# EAGLE board CT_schematic (EAGLE 7.6.0)

Size 100 x 80 mm. Coordinates in mm from the lower left corner, seen from the top.
Outline: 0,0 100,0 100,80 0,80 0,0
Copper layers (1*16): Top 0.035mm / dielectric 1.5mm / Bottom 0.035mm
Design rules "default": minimum track width 10mil, minimum drill 24mil, track to track 8mil, track to pad 8mil, pad to pad 8mil, via to via 8mil, smd to smd 8mil, copper to edge 40mil, drill to drill 8mil, minimum pad ring 10mil, minimum via ring 8mil, stop-mask expansion 4mil, vias tented up to drill 0mil, thermal gap 10mil

## Footprints (pad centres in the part's own frame; a part is rotated, then mirrored left to right if it is on the bottom)
C0603 = smd 0.8 x 0.8: 1 -0.762,0; 2 0.762,0
C0402 = smd 0.5 x 0.5: 1 -0.508,0; 2 0.508,0
C0805 = smd 1.2 x 1.3: 1 -1.016,0; 2 1.016,0
C1206 = smd 1.3 x 1.6: 1 -1.524,0; 2 1.524,0
C1210 = smd 1.2 x 2.5: 1 -1.524,0; 2 1.524,0
EXV-9H = smd 3.505 x 1.676: 1 -2.857,0; 2 2.857,0
L0603 = smd 0.8 x 0.8: 1 -0.762,0; 2 0.762,0
PJ-037B_PACKAGE = drill 3.7 square: 1 12,0 | drill 3.2 square: 2 6,0
R0603 = smd 0.8 x 0.8: 1 -0.762,0; 2 0.762,0
LQFP48 = smd 0.3 x 1.2: 1 -2.75,-4.25; 2 -2.25,-4.25; 3 -1.75,-4.25; 4 -1.25,-4.25; 5 -0.75,-4.25; 6 -0.25,-4.25; 7 0.25,-4.25; 8 0.75,-4.25; 9 1.25,-4.25; 10 1.75,-4.25; 11 2.25,-4.25; 12 2.75,-4.25; 25 2.75,4.25; 26 2.25,4.25; 27 1.75,4.25; 28 1.25,4.25; 29 0.75,4.25; 30 0.25,4.25; 31 -0.25,4.25; 32 -0.75,4.25; 33 -1.25,4.25; 34 -1.75,4.25; 35 -2.25,4.25; 36 -2.75,4.25 | smd 1.2 x 0.3: 13 4.25,-2.75; 14 4.25,-2.25; 15 4.25,-1.75; 16 4.25,-1.25; 17 4.25,-0.75; 18 4.25,-0.25; 19 4.25,0.25; 20 4.25,0.75; 21 4.25,1.25; 22 4.25,1.75; 23 4.25,2.25; 24 4.25,2.75; 37 -4.25,2.75; 38 -4.25,2.25; 39 -4.25,1.75; 40 -4.25,1.25; 41 -4.25,0.75; 42 -4.25,0.25; 43 -4.25,-0.25; 44 -4.25,-0.75; 45 -4.25,-1.25; 46 -4.25,-1.75; 47 -4.25,-2.25; 48 -4.25,-2.75
SSOP-28 = smd 1.5 x 0.4: 1 -3.625,4.225; 2 -3.625,3.575; 3 -3.625,2.925; 4 -3.625,2.275; 5 -3.625,1.625; 6 -3.625,0.975; 7 -3.625,0.325; 8 -3.625,-0.325; 9 -3.625,-0.975; 10 -3.625,-1.625; 11 -3.625,-2.275; 12 -3.625,-2.925; 13 -3.625,-3.575; 14 -3.625,-4.225; 15 3.625,-4.225; 16 3.625,-3.575; 17 3.625,-2.925; 18 3.625,-2.275; 19 3.625,-1.625; 20 3.625,-0.975; 21 3.625,-0.325; 22 3.625,0.325; 23 3.625,0.975; 24 3.625,1.625; 25 3.625,2.275; 26 3.625,2.925; 27 3.625,3.575; 28 3.625,4.225
FCI_10118193-0001LF = smd 0.4 x 1.35: 1 -1.3,2.675; 2 -0.65,2.675; 3 0,2.675; 4 0.65,2.675; 5 1.3,2.675 | smd 1.6 x 1.4: 6 -3.2,2.45; 7 3.2,2.45 | smd 1.9 x 1.9: 8 -1.2,0; 9 1.2,0 | hole 0.5: -3.3,0; 3.3,0
HTSS-105-01-G-D = drill 1 pad 1.8 square: 1 0,0 | drill 1 pad 1.8: 2 0,2.54; 3 2.54,0; 4 2.54,2.54; 5 5.08,0; 6 5.08,2.54; 7 7.62,0; 8 7.62,2.54; 9 10.16,0; 10 10.16,2.54
ABS07-32.768KHZ-7-T = smd 1.1 x 2.4: 1 -2.5,0; 2 0,0
ABLS-25.000MHZ-B2F-T = smd 5.6 x 2.8: 1 -3.81,0; 2 5.69,0
ABLS-12.000MHZ-B4-T = smd 5.6 x 2.8: 1 0,0; 2 9.5,0
WSON-8 = smd 0.3 x 0.6: 1 -0.75,0; 2 0.05,0; 3 0.85,0; 4 1.65,0; 5 1.65,3.8; 6 0.85,3.8; 7 0.05,3.8; 8 -0.75,3.8 | smd 3 x 2.6: PAD 0.45,1.9
SON-6 = smd 0.55 x 0.3: 1 -0.355,0.5 | smd 0.52 x 0.3: 2 -0.37,0; 3 -0.37,-0.5; 4 0.37,-0.5; 5 0.37,0; 6 0.37,0.5
SW_4-1437565-2 = smd 1.4 x 2.1: 1 -2.23,4.55; 2 -2.23,-4.55; 3 2.23,4.55; 4 2.23,-4.55
LGM67K-G1J2-24-Z = smd 0.8 x 1.4: A -2,0; C 0,0
NC7SZ125M5X = smd 1.3 x 0.7: 1 -1.3,0.95; 2 -1.3,0; 3 -1.3,-0.95; 4 1.3,-0.95; 5 1.3,0.95

## Placement (x,y rotation side)
C1  1e-07  [C0603]  -15.24,59.69 0 top  (outside the outline)
C2  1e-07  [C0603]  -19.05,59.69 0 top  (outside the outline)
C3  4.7e-06  [C0603]  -64.77,54.61 0 top  (outside the outline)
C4  1e-07  [C0603]  -22.86,59.69 0 top  (outside the outline)
C5  1e-08  [C0603]  -26.67,59.69 0 top  (outside the outline)
C6  1e-06  [C0603]  -30.48,59.69 0 top  (outside the outline)
C7  1e-11  [C0402]  -64.77,59.69 0 top  (outside the outline)
C8  1e-11  [C0402]  -15.24,64.77 0 top  (outside the outline)
C9  1e-11  [C0402]  -19.05,64.77 0 top  (outside the outline)
C10  1e-11  [C0402]  -22.86,64.77 0 top  (outside the outline)
C11  1e-07  [C0402]  -26.67,64.77 0 top  (outside the outline)
C12  4.7e-06  [C0805]  -66.04,46.99 0 top  (outside the outline)
C13  1e-07  [C0402]  -30.48,64.77 0 top  (outside the outline)
C14  1e-07  [C0402]  -34.29,64.77 0 top  (outside the outline)
C15  1e-07  [C0402]  -38.1,64.77 0 top  (outside the outline)
C16  1e-07  [C0402]  -41.91,64.77 0 top  (outside the outline)
C17  1e-07  [C0402]  -45.72,64.77 0 top  (outside the outline)
C18  1e-07  [C0402]  -49.53,64.77 0 top  (outside the outline)
C19  1e-07  [C0402]  -53.34,64.77 0 top  (outside the outline)
C20  1e-08  [C0402]  -57.15,64.77 0 top  (outside the outline)
C21  1e-05  [C1206]  -54.61,46.99 0 top  (outside the outline)
C22  1e-05  [C1210]  -48.26,46.99 0 top  (outside the outline)
C23  1e-07  [C0402]  -60.96,64.77 0 top  (outside the outline)
C24  0.0001  [EXV-9H]  -48.26,31.75 0 top  (outside the outline)
C25  0.0001  [EXV-9H]  -59.69,31.75 0 top  (outside the outline)
C26  1e-08  [C0402]  -64.77,64.77 0 top  (outside the outline)
F1  240.0  [L0603]  -34.29,59.69 0 top  (outside the outline)
J1  PJ-037B  [PJ-037B_PACKAGE]  -52.07,7.62 0 top  (outside the outline)
R1  10000.0  [R0603]  -35.56,54.61 0 top  (outside the outline)
R2  1000.0  [R0603]  -38.1,59.69 0 top  (outside the outline)
R3  1600.5  [R0603]  -41.91,59.69 0 top  (outside the outline)
R4  4700.0  [R0603]  -45.72,59.69 0 top  (outside the outline)
R5  10000.0  [R0603]  -40.64,54.61 0 top  (outside the outline)
R6  4700.0  [R0603]  -49.53,59.69 0 top  (outside the outline)
R7  10000.0  [R0603]  -45.72,54.61 0 top  (outside the outline)
R8  10000.0  [R0603]  -50.8,54.61 0 top  (outside the outline)
R9  100000.0  [R0603]  -15.24,54.61 0 top  (outside the outline)
R10  100000.0  [R0603]  -20.32,54.61 0 top  (outside the outline)
R11  2231.0  [R0603]  -53.34,59.69 0 top  (outside the outline)
R12  1000.0  [R0603]  -57.15,59.69 0 top  (outside the outline)
R13  10000.0  [R0603]  -55.88,54.61 0 top  (outside the outline)
R14  10000.0  [R0603]  -60.96,54.61 0 top  (outside the outline)
R15  9100.0  [R0603]  -60.96,59.69 0 top  (outside the outline)
R16  680000.0  [R0603]  -25.4,54.61 0 top  (outside the outline)
R17  120000.0  [R0603]  -30.48,54.61 0 top  (outside the outline)
U1  STM32F030CCT6  [LQFP48]  -44.45,20.32 0 top  (outside the outline)
U2  FT232RL-REEL  [SSOP-28]  -20.32,7.62 0 top  (outside the outline)
U3  10118193-0001LF  [FCI_10118193-0001LF]  -38.1,31.75 0 top  (outside the outline)
U4  ST3241EBPR  [SSOP-28]  -31.75,7.62 0 top  (outside the outline)
U5  HTSS-105-01-G-D  [HTSS-105-01-G-D]  -64.77,19.05 0 top  (outside the outline)
U6  ABS07-32.768KHZ-7-T  [ABS07-32.768KHZ-7-T]  -27.94,48.26 0 top  (outside the outline)
U7  ABLS-25.000MHZ-B2F-T  [ABLS-25.000MHZ-B2F-T]  -26.67,40.64 0 top  (outside the outline)
U8  ABLS-12.000MHZ-B4-T  [ABLS-12.000MHZ-B4-T]  -50.8,40.64 0 top  (outside the outline)
U9  LP3878SDX-ADJ/NOPB  [WSON-8]  -30.48,30.48 0 top  (outside the outline)
U10  TPS3895ADRYR  [SON-6]  -13.97,68.58 0 top  (outside the outline)
U11  4-1437565-2  [SW_4-1437565-2]  -27.94,21.59 0 top  (outside the outline)
U12  Q65110A2395  [LGM67K-G1J2-24-Z]  -36.83,48.26 0 top  (outside the outline)
U13  nc7sz125m5x  [NC7SZ125M5X]  -59.69,46.99 0 top  (outside the outline)

## Library data of the parts
C1-C26 F1 J1 R1-R17 U1-U13 = circuit_tree

## Nets
CLK_CRYSTAL_U1_3: C7.1 U1.3 U6.1
CLK_CRYSTAL_U1_4: C8.1 U1.4 U6.2
CLK_CRYSTAL_U1_5: C9.1 U1.5 U7.1
CLK_CRYSTAL_U1_6: C10.1 U1.6 U7.2
CLK_CRYSTAL_U2_27: U2.27 U8.1
CLK_CRYSTAL_U2_28: U2.28 U8.2
GND: C1.2 C2.2 C3.2 C4.2 C5.2 C6.2 C7.2 C8.2 C9.2 C10.2 C11.2 C12.2 C13.2 C14.2 C15.2 C18.2 C19.2 C20.2 C21.2 C22.2 C23.2 C24.2 C25.2 C26.2 J1.2 R2.2 R5.2 R8.2 R12.2 R15.2 R17.2 U1.8 U1.23 U1.35 U1.47 U2.7 U2.18 U2.21 U2.25 U2.26 U3.5 U3.6 U3.7 U3.8 U3.9 U4.23 U4.25 U5.9 U9.3 U9.PAD U10.2 U12.C U13.1 U13.3
NET_U1_7: R4.1 U1.7 U13.4
NET_U1_9: C5.1 C6.1 F1.1 U1.9
NET_U1_44: R5.1 U1.44
NET_U1_45: R3.1 U1.45 U12.A
NET_U1_46: R1.1 U1.46 U11.3 U11.4
NET_U2_14: R7.1 U2.14
NET_U2_17: C13.1 U2.17
NET_U2_19: R8.1 U2.19
NET_U3_1: R6.1 U3.1
NET_U3_2: U2.16 U3.2
NET_U3_3: U2.15 U3.3
NET_U3_19: R6.2
NET_U4_1: C17.1 U4.1
NET_U4_2: C17.2 U4.2
NET_U4_3: C19.1 U4.3
NET_U4_22: R9.1 U4.22
NET_U4_24: C16.2 U4.24
NET_U4_27: C18.1 U4.27
NET_U4_28: C16.1 U4.28
NET_U5_3: U4.4 U5.3
NET_U5_4: U4.5 U5.4
NET_U5_5: U4.9 U5.5
NET_U5_6: U4.10 U5.6
NET_U9_1: C20.1 U9.1
NET_U9_6: R11.2 R12.1 U9.6
NET_U9_8: R10.1 U9.8
NET_U10_1: R14.1 R15.1 U10.1
NET_U10_3: R16.2 R17.1 U10.3
NET_U10_4: R13.1 U10.4 U13.2
NET_U11_1: R2.1 U11.1 U11.2
PROC_USART1_CTS: U1.32 U2.3
PROC_USART1_RTS: U1.33 U2.11
PROC_USART1_RX: U1.31 U2.1
PROC_USART1_TX: U1.30 U2.5
PROC_USART2_CTS: U1.10 U4.13
PROC_USART2_RTS: U1.11 U4.18
PROC_USART2_RX: U1.13 U4.19
PROC_USART2_TX: U1.12 U4.14
VCC_S1_10V2: C21.1 C24.1 C25.1 J1.1 R10.2 U9.4
VCC_TIER1_3V3: C1.1 C2.1 C3.1 C4.1 C11.1 C12.1 C14.1 C15.1 C22.1 C23.1 C26.1 F1.2 R1.2 R3.2 R4.2 R7.2 R9.2 R11.1 R13.2 R14.2 R16.1 U1.1 U1.24 U1.36 U1.48 U2.4 U2.20 U4.26 U9.5 U10.6 U13.5

## Tracks (layer width: path | path; a pad name or v marks a point on that pad's centre or on a via)
CLK_CRYSTAL_U1_3  (2 unrouted)
CLK_CRYSTAL_U1_4  (2 unrouted)
CLK_CRYSTAL_U1_5  (2 unrouted)
CLK_CRYSTAL_U1_6  (2 unrouted)
CLK_CRYSTAL_U2_27  (1 unrouted)
CLK_CRYSTAL_U2_28  (1 unrouted)
GND  (53 unrouted)
NET_U1_7  (2 unrouted)
NET_U1_9  (3 unrouted)
NET_U1_44  (1 unrouted)
NET_U1_45  (2 unrouted)
NET_U1_46  (3 unrouted)
NET_U2_14  (1 unrouted)
NET_U2_17  (1 unrouted)
NET_U2_19  (1 unrouted)
NET_U3_1  (1 unrouted)
NET_U3_2  (1 unrouted)
NET_U3_3  (1 unrouted)
NET_U4_1  (1 unrouted)
NET_U4_2  (1 unrouted)
NET_U4_3  (1 unrouted)
NET_U4_22  (1 unrouted)
NET_U4_24  (1 unrouted)
NET_U4_27  (1 unrouted)
NET_U4_28  (1 unrouted)
NET_U5_3  (1 unrouted)
NET_U5_4  (1 unrouted)
NET_U5_5  (1 unrouted)
NET_U5_6  (1 unrouted)
NET_U9_1  (1 unrouted)
NET_U9_6  (2 unrouted)
NET_U9_8  (1 unrouted)
NET_U10_1  (2 unrouted)
NET_U10_3  (2 unrouted)
NET_U10_4  (2 unrouted)
NET_U11_1  (2 unrouted)
PROC_USART1_CTS  (1 unrouted)
PROC_USART1_RTS  (1 unrouted)
PROC_USART1_RX  (1 unrouted)
PROC_USART1_TX  (1 unrouted)
PROC_USART2_CTS  (1 unrouted)
PROC_USART2_RTS  (1 unrouted)
PROC_USART2_RX  (1 unrouted)
PROC_USART2_TX  (1 unrouted)
VCC_S1_10V2  (5 unrouted)
VCC_TIER1_3V3  (30 unrouted)